# Altium PCB board.PcbDoc
Units mm, origin at the board's own origin, x right, y up, seen from the top; angles counter-clockwise.
Board outline 50 x 30 mm, 2 copper layers (Top Layer, Bottom Layer), stack 0.97 mm thick; 170 components, 47 nets, 375 pads, 78 vias.
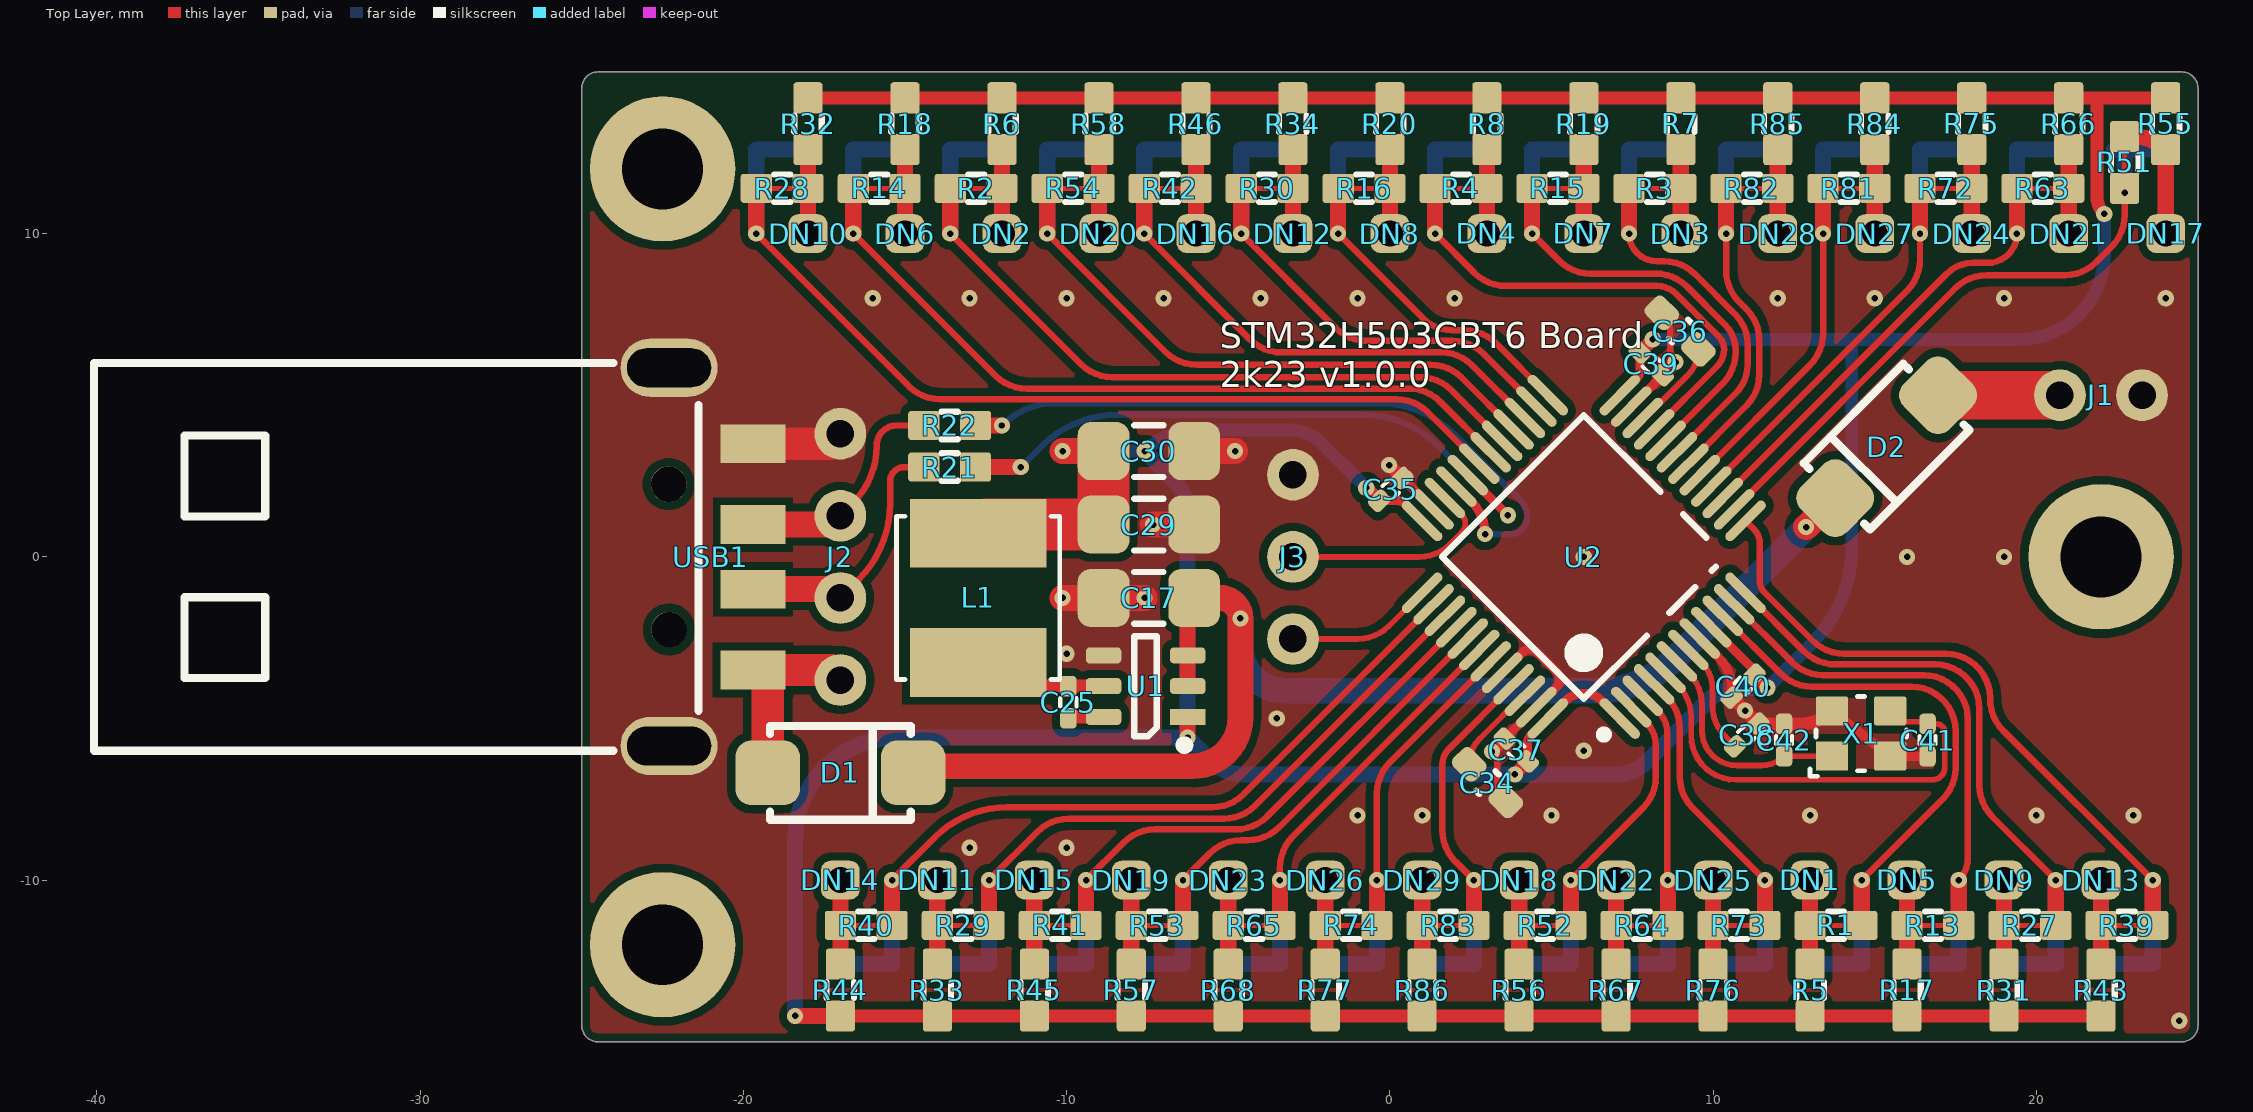
[diagram p0: Top Layer view]
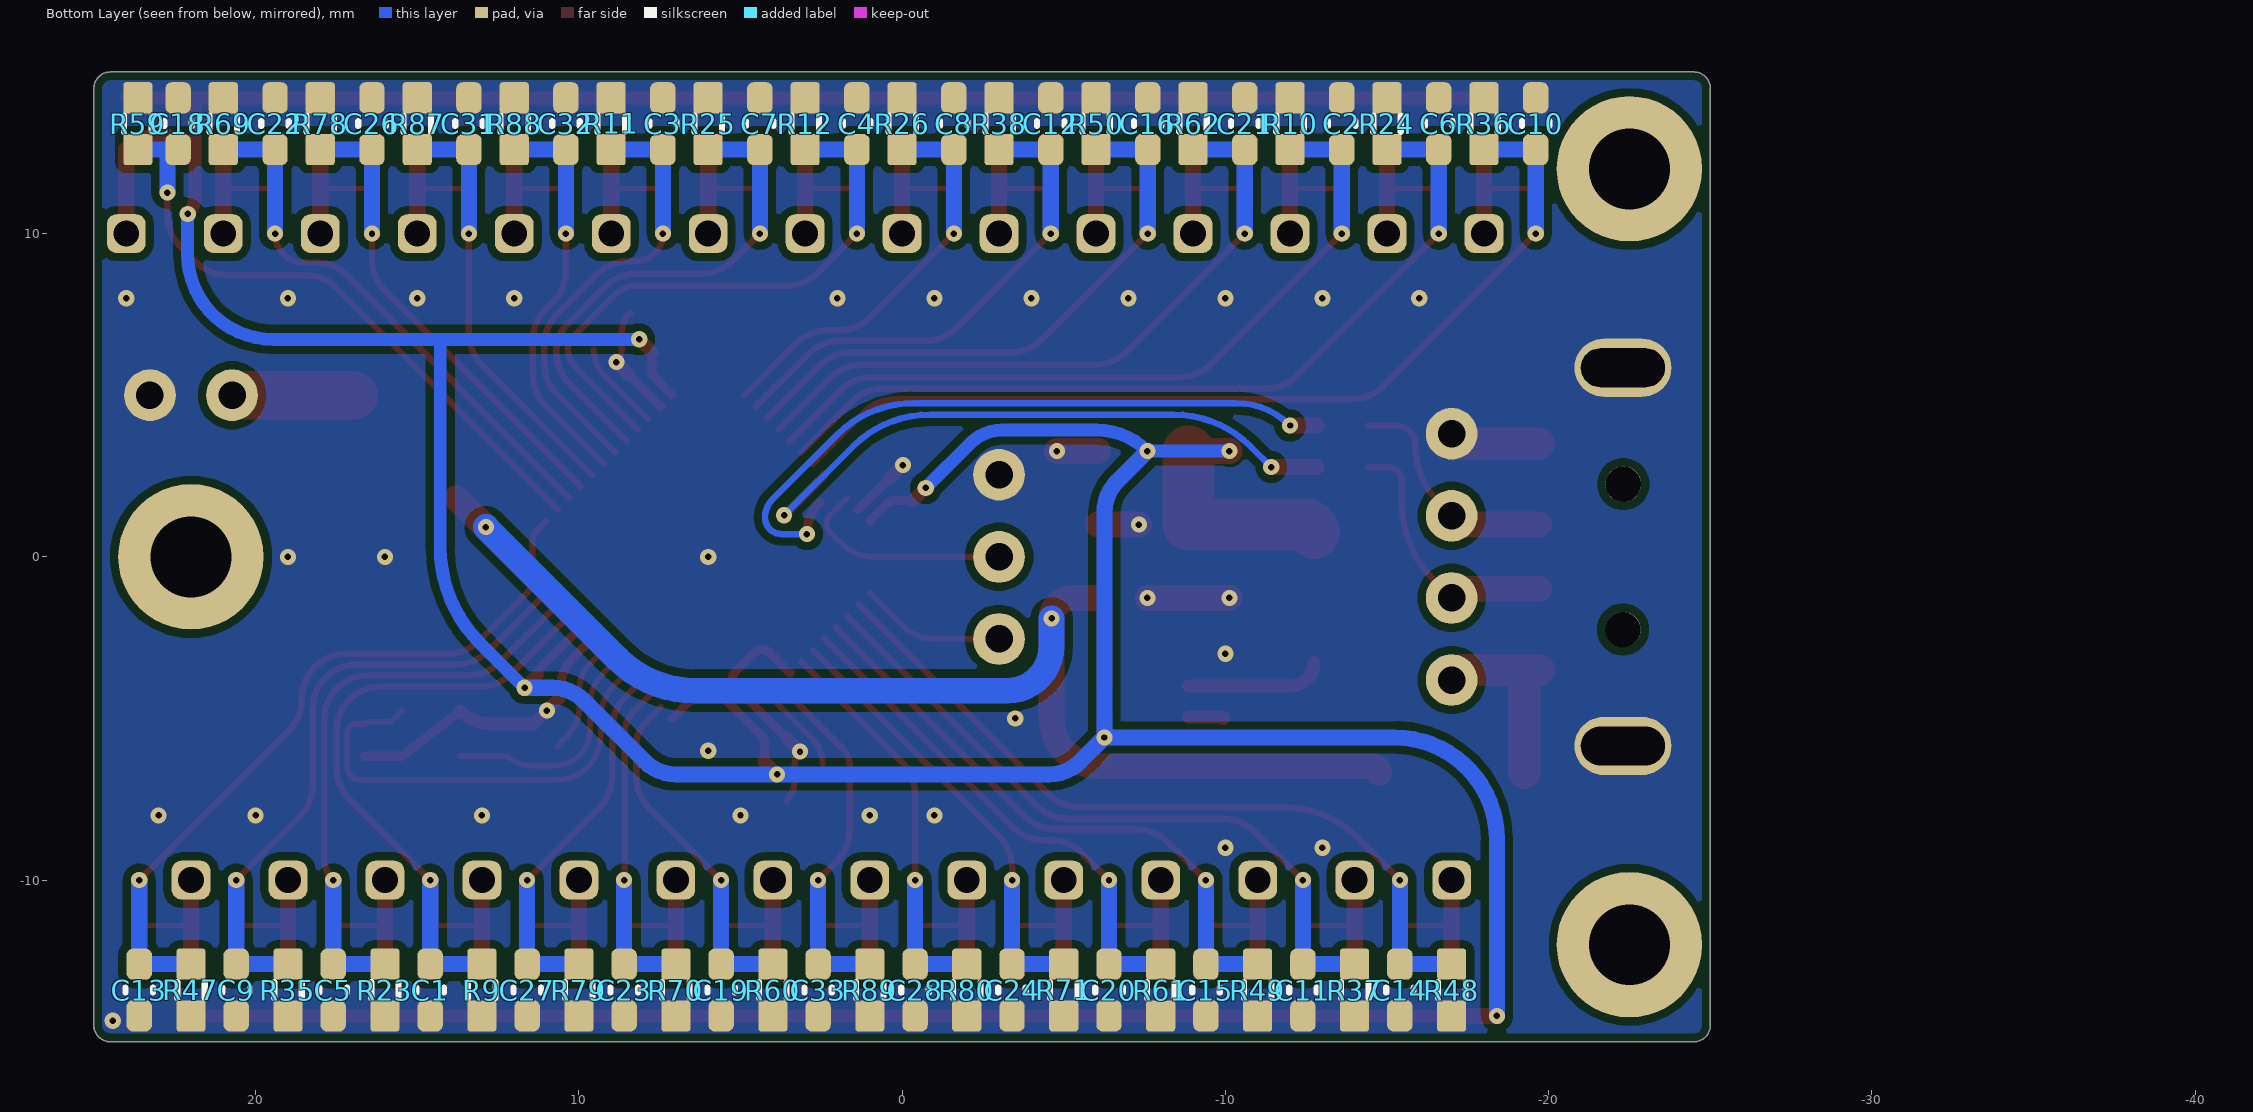
[diagram p1: Bottom Layer view, seen from below]
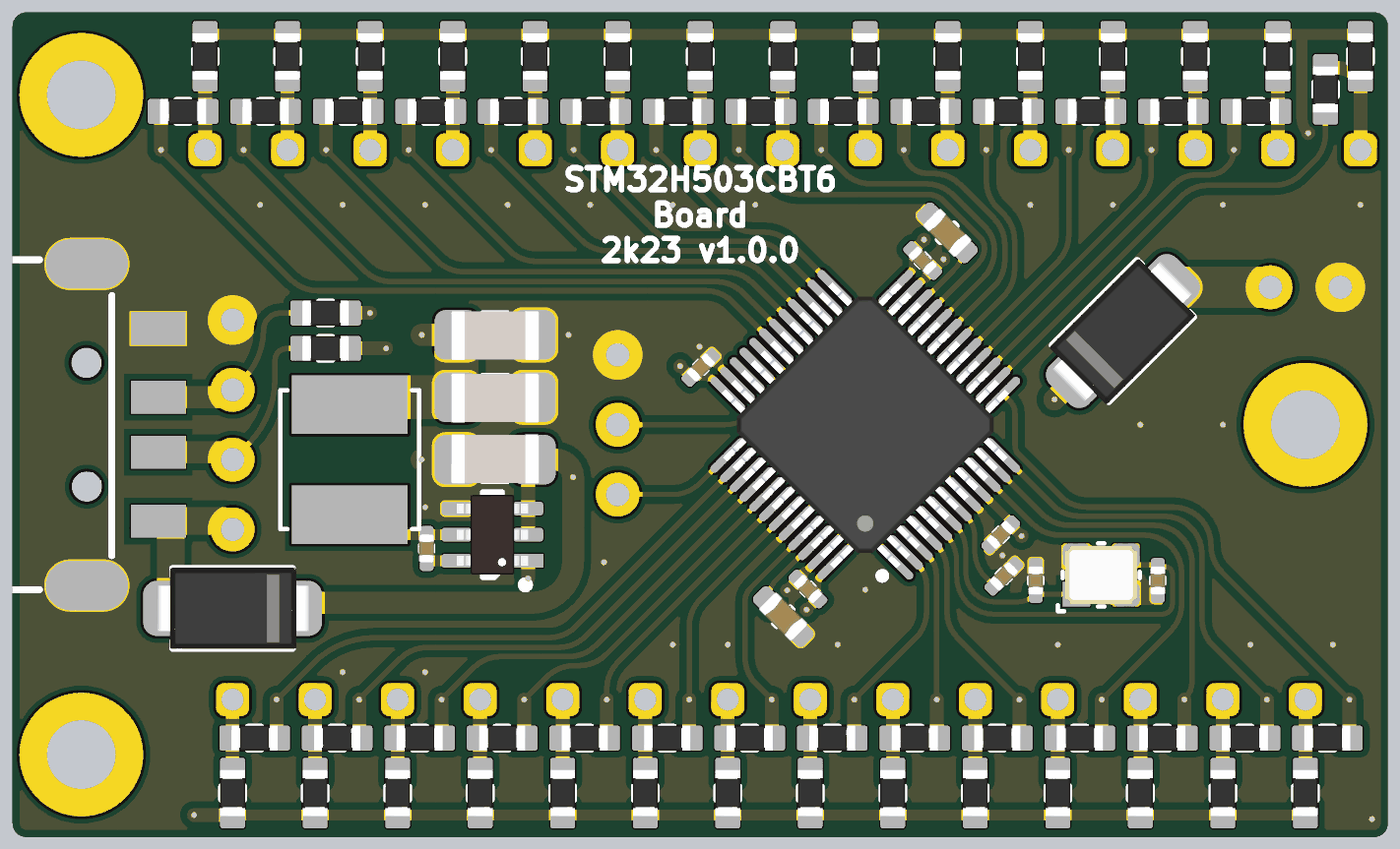
[diagram p2: 3D render of the assembled board from above, using the file's embedded part models]
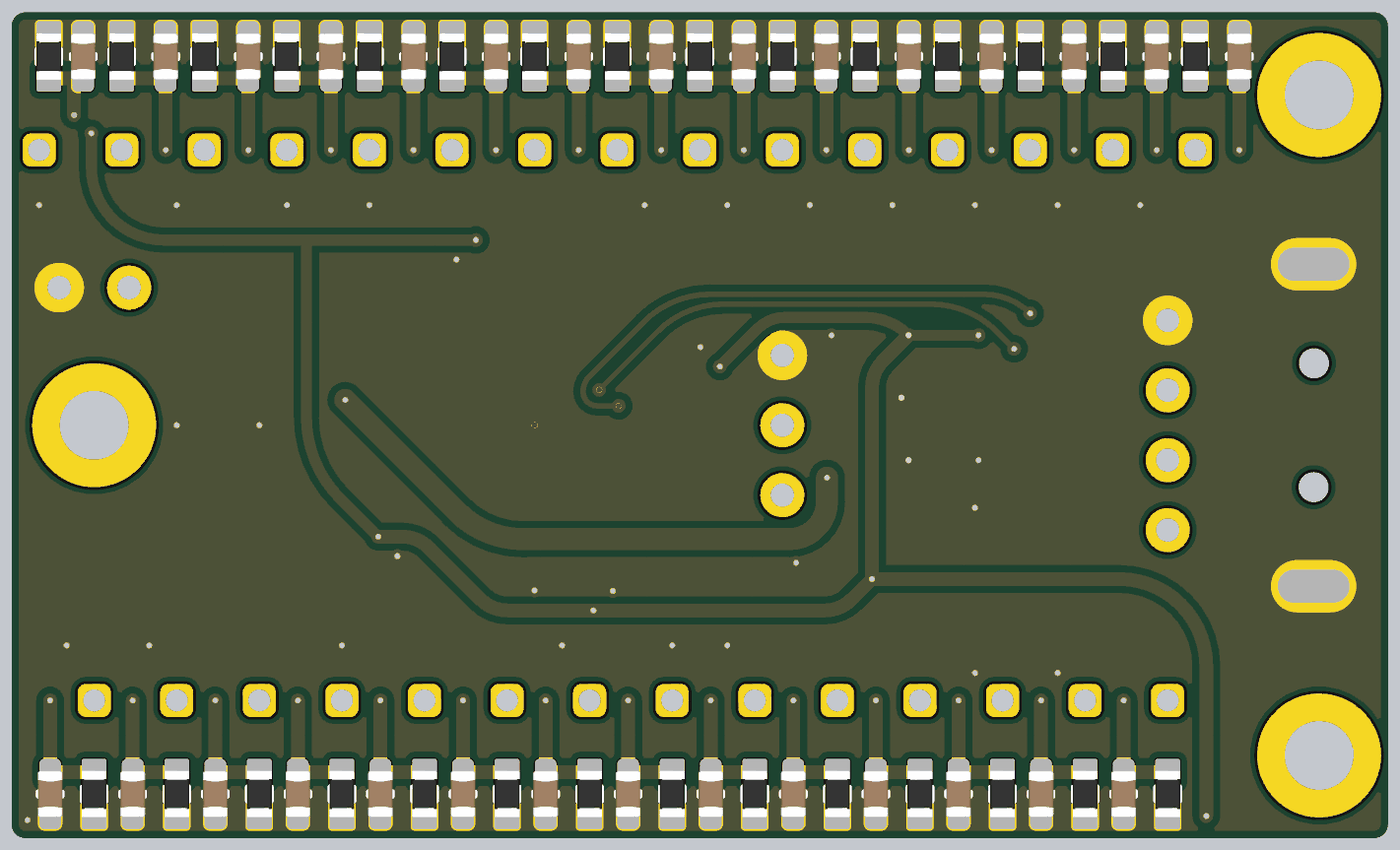
[diagram p3: 3D render of the assembled board from below, using the file's embedded part models]

## Layer stack, top to bottom
Top Solder: solder mask 0.0127, Solder Resist, Dk 3.8
Top Layer: signal copper 0.035
Dielectric: core 0.9, FR-4, Dk 4.5
Bottom Layer: signal copper 0.035
Bottom Solder: solder mask 0.0127, Solder Resist, Dk 3.8

## Board outline
-25,-14.5 ccw(c-24.5,-14.5) -24.5,-15 24.5,-15 ccw(c24.5,-14.5) 25,-14.5 25,14.5 ccw(c24.5,14.5) 24.5,15 -24.5,15 ccw(c-24.5,14.5) -25,14.5

## Design rules (kind name [scope] priority, off if disabled: settings)
AcuteAngle [All] p1: minimum=6.00000000000000E+0001 checktracksonly=FALSE
Clearance Clearance_1 [InNetClass('220')] p1: gap=2 ignorepadtopadclearanceinfootprint=FALSE except(0.13: Arc-Arc Arc-Track Arc-SMDPad Arc-Via Track-Track Track-SMDPad Track-Via SMDPad-SMDPad SMDPad-Via THPad-Via Via-Via; 0.15: Arc-THPad Arc-Text Arc-Hole Track-THPad Track-Text Track-Hole SMDPad-THPad SMDPad-Text SMDPad-Hole THPad-THPad THPad-Text THPad-Hole Via-Text Via-Hole Fill-Text Fill-Hole Poly-Text Poly-Hole Region-Text Region-Hole Text-Text Text-Hole)
Clearance [All] p2: gap=0.25 ignorepadtopadclearanceinfootprint=FALSE except(0.13: Arc-Arc Arc-Track Arc-SMDPad Arc-Via Track-Track Track-SMDPad Track-Via SMDPad-SMDPad SMDPad-Via THPad-Via Via-Via; 0.15: Arc-THPad Arc-Text Arc-Hole Track-THPad Track-Text Track-Hole SMDPad-THPad SMDPad-Text SMDPad-Hole THPad-THPad THPad-Text THPad-Hole Via-Text Via-Hole Fill-Text Fill-Hole Poly-Text Poly-Hole Region-Text Region-Hole Text-Text Text-Hole)
ComponentClearance ComponentClearance_1 [HasFootprint('HDR-1X3') OR HasFootprint('PAD_CAST2_0.8MM')] p1: gap=-1 collisioncheckmode=3 verticalgap=2540 showdistances=FALSE
ComponentClearance ComponentClearance_2 [HasFootprint('TP2030_SMD')] p2: gap=-1 collisioncheckmode=3 verticalgap=2540 showdistances=FALSE
ComponentClearance [All] p3: gap=0.3 collisioncheckmode=3 verticalgap=0.254 showdistances=FALSE
HoleSize [All] p1: absolutevalues=TRUE maxlimit=6 minlimit=0.2 maxpercent=80.000 minpercent=20.000
HoleToHoleClearance HoleToHoleClearance_1 [IsVia vs IsThruPin] p1: gap=0.7 allowstackedmicrovias=TRUE
HoleToHoleClearance [All] p2: gap=0.5 allowstackedmicrovias=TRUE
MinimumSolderMaskSliver [All] p1 off: minsoldermaskwidth=0.254
PlaneClearance [All] p1: clearance=0.45
PlaneConnect [All] p1: planeconnectstyle=Direct reliefexpansion=0.3 reliefentries=4 reliefconductorwidth=0.381 reliefairgap=0.178
PolygonConnect [All] p1: connectstyle=Direct reliefconductorwidth=0.381 reliefentries=4 polygonreliefangle="90 Angle" airgapwidth=0.356
RoutingVias [All] p1: holewidth=0.3 width=0.6 viastyle="Through Hole" minholewidth=0.2 minwidth=0.45 maxholewidth=0.9 maxwidth=1.27
SilkToSilkClearance [All] p1 off: silktosilkclearance=0.254
SilkToSolderMaskClearance [IsPad] p1 off: minsilkscreentomaskgap=0.254 clearancetoexposedcopper=TRUE
SolderMaskExpansion [All] p1: expansion=0.102 istentingtop=FALSE
UnRoutedNet [All] p1: checkbadconnections=TRUE
Width [All] p1: maxlimit=3.81 minlimit=0.14 preferedwidth=0.254
21 further rules are at their usual default settings.

## Components (designator, comment, footprint, x,y, rotation, side; value= is the part's Value field where it differs from the comment)
C1 "100nF" C0603 14.6,-13.4 r90 bottom
C2 "100nF" C0603 -13.6,13.4 r270 bottom
C3 "100nF" C0603 7.4,13.4 r270 bottom
C4 "100nF" C0603 1.4,13.4 r270 bottom
C5 "100nF" C0603 17.6,-13.4 r90 bottom
C6 "100nF" C0603 -16.6,13.4 r270 bottom
C7 "100nF" C0603 4.4,13.4 r270 bottom
C8 "100nF" C0603 -1.6,13.4 r270 bottom
C9 "100nF" C0603 20.6,-13.4 r90 bottom
C10 "100nF" C0603 -19.6,13.4 r270 bottom
C11 "100nF" C0603 -12.4,-13.4 r90 bottom
C12 "100nF" C0603 -4.6,13.4 r270 bottom
C13 "100nF" C0603 23.6,-13.4 r90 bottom
C14 "100nF" C0603 -15.4,-13.4 r90 bottom
C15 "100nF" C0603 -9.4,-13.4 r90 bottom
C16 "100nF" C0603 -7.6,13.4 r270 bottom
C17 "10uF" C1206 -7.456,-1.27 r0 top
C18 "100nF" C0603 22.4,13.4 r270 bottom
C19 "100nF" C0603 5.6,-13.4 r90 bottom
C20 "100nF" C0603 -6.4,-13.4 r90 bottom
C21 "100nF" C0603 -10.6,13.4 r270 bottom
C22 "100nF" C0603 19.4,13.4 r270 bottom
C23 "100nF" C0603 8.6,-13.4 r90 bottom
C24 "100nF" C0603 -3.4,-13.4 r90 bottom
C25 "100nF" C0402 -9.946,-4.5 r270 top
C26 "100nF" C0603 16.4,13.4 r270 bottom
C27 "100nF" C0603 11.6,-13.4 r90 bottom
C28 "100nF" C0603 -0.4,-13.4 r90 bottom
C29 "10uF" C1206 -7.456,1 r180 top
C30 "10uF" C1206 -7.456,3.27 r180 top
C31 "100nF" C0603 13.4,13.4 r270 bottom
C32 "100nF" C0603 10.4,13.4 r270 bottom
C33 "100nF" C0603 2.6,-13.4 r90 bottom
C34 "2.2u" C0603 3.02,-6.984 r135 top
C35 "100nF" C0402 0.025,2.086 r225 top
C36 "2.2u" C0603 8.98,6.984 r315 top
C37 "100nF" C0402 3.914,-5.975 r315 top
C38 "100nF" C0402 11.036,-5.51 r225 top
C39 "100nF" C0402 8.086,5.975 r135 top
C40 "100nF" C0402 10.925,-3.999 r45 top
C41 "18pF" C0402 16.634,-5.666 r90 top
C42 "18pF" C0402 12.196,-5.666 r270 top
D1 "WO" SMA -17,-6.682 r0 top
D2 "WO" SMA 15.367,3.409 r225 top
DN1 "" PAD_CAST2_0.8MM#1 13,-10 r180 top
DN2 "" PAD_CAST2_0.8MM#1 -12,10 r90 top
DN3 "" PAD_CAST2_0.8MM#1 9,10 r90 top
DN4 "" PAD_CAST2_0.8MM#1 3,10 r90 top
DN5 "" PAD_CAST2_0.8MM#1 16,-10 r0 top
DN6 "" PAD_CAST2_0.8MM#1 -15,10 r90 top
DN7 "" PAD_CAST2_0.8MM#1 6,10 r90 top
DN8 "" PAD_CAST2_0.8MM#1 0,10 r90 top
DN9 "" PAD_CAST2_0.8MM#1 19,-10 r0 top
DN10 "" PAD_CAST2_0.8MM#2 -17.2,10 r90 top
DN11 "" PAD_CAST2_0.8MM#1 -14,-10 r90 top
DN12 "" PAD_CAST2_0.8MM#1 -3,10 r90 top
DN13 "" PAD_CAST2_0.8MM#1 22,-10 r90 top
DN14 "" PAD_CAST2_0.8MM#3 -12.6,-10 r90 top
DN15 "" PAD_CAST2_0.8MM#1 -11,-10 r90 top
DN16 "" PAD_CAST2_0.8MM#1 -6,10 r90 top
DN17 "" PAD_CAST2_0.8MM#1 24,10 r90 top
DN18 "" PAD_CAST2_0.8MM#1 4,-10 r0 top
DN19 "" PAD_CAST2_0.8MM#1 -8,-10 r90 top
DN20 "" PAD_CAST2_0.8MM#1 -9,10 r90 top
DN21 "" PAD_CAST2_0.8MM#1 21,10 r270 top
DN22 "" PAD_CAST2_0.8MM#1 7,-10 r0 top
DN23 "" PAD_CAST2_0.8MM#1 -5,-10 r90 top
DN24 "" PAD_CAST2_0.8MM#1 18,10 r90 top
DN25 "" PAD_CAST2_0.8MM#1 10,-10 r0 top
DN26 "" PAD_CAST2_0.8MM#1 -2,-10 r90 top
DN27 "" PAD_CAST2_0.8MM#1 15,10 r90 top
DN28 "" PAD_CAST2_0.8MM#1 12,10 r90 top
DN29 "" PAD_CAST2_0.8MM#1 1,-10 r90 top
J1 "Header 2" HDR-1X2_2.54 22,5 r90 top
J2 "Header 4" HDR-1X4_2.54 -17,0 r180 top
J3 "SWD" HDR-1X3_2.54 -3,0 r180 top
L1 "3.9uH" IND_5020_L5.0-W5.0 -12.74,-1.27 r270 top
R1 "?" R0603 13.8,-11.4 r180 top
R2 "?" R0603 -12.8,11.4 r0 top
R3 "?" R0603 8.2,11.4 r0 top
R4 "?" R0603 2.2,11.4 r0 top
R5 "?" R0603 13,-13.4 r90 top
R6 "?" R0603 -12,13.4 r270 top
R7 "?" R0603 9,13.4 r270 top
R8 "?" R0603 3,13.4 r270 top
R9 "?" R0603 13,-13.4 r90 bottom
R10 "?" R0603 -12,13.4 r270 bottom
R11 "?" R0603 9,13.4 r270 bottom
R12 "?" R0603 3,13.4 r270 bottom
R13 "?" R0603 16.8,-11.4 r180 top
R14 "?" R0603 -15.8,11.4 r0 top
R15 "?" R0603 5.2,11.4 r0 top
R16 "?" R0603 -0.8,11.4 r0 top
R17 "?" R0603 16,-13.4 r90 top
R18 "?" R0603 -15,13.4 r270 top
R19 "?" R0603 6,13.4 r270 top
R20 "?" R0603 0,13.4 r270 top
R21 "22" R0603 -13.619,2.778 r0 top
R22 "22" R0603 -13.619,4.064 r0 top
R23 "?" R0603 16,-13.4 r90 bottom
R24 "?" R0603 -15,13.4 r270 bottom
R25 "?" R0603 6,13.4 r270 bottom
R26 "?" R0603 0,13.4 r270 bottom
R27 "?" R0603 19.8,-11.4 r180 top
R28 "?" R0603 -18.8,11.4 r0 top
R29 "?" R0603 -13.2,-11.4 r180 top
R30 "?" R0603 -3.8,11.4 r0 top
R31 "?" R0603 19,-13.4 r90 top
R32 "?" R0603 -18,13.4 r270 top
R33 "?" R0603 -14,-13.4 r90 top
R34 "?" R0603 -3,13.4 r270 top
R35 "?" R0603 19,-13.4 r90 bottom
R36 "?" R0603 -18,13.4 r270 bottom
R37 "?" R0603 -14,-13.4 r90 bottom
R38 "?" R0603 -3,13.4 r270 bottom
R39 "?" R0603 22.8,-11.4 r180 top
R40 "?" R0603 -16.2,-11.4 r180 top
R41 "?" R0603 -10.2,-11.4 r180 top
R42 "?" R0603 -6.8,11.4 r0 top
R43 "?" R0603 22,-13.4 r90 top
R44 "?" R0603 -17,-13.4 r90 top
R45 "?" R0603 -11,-13.4 r90 top
R46 "?" R0603 -6,13.4 r270 top
R47 "?" R0603 22,-13.4 r90 bottom
R48 "?" R0603 -17,-13.4 r90 bottom
R49 "?" R0603 -11,-13.4 r90 bottom
R50 "?" R0603 -6,13.4 r270 bottom
R51 "?" R0603 22.73,12.2 r90 top
R52 "?" R0603 4.8,-11.4 r180 top
R53 "?" R0603 -7.2,-11.4 r180 top
R54 "?" R0603 -9.8,11.4 r0 top
R55 "?" R0603 24,13.4 r270 top
R56 "?" R0603 4,-13.4 r90 top
R57 "?" R0603 -8,-13.4 r90 top
R58 "?" R0603 -9,13.4 r270 top
R59 "?" R0603 23.644,13.4 r270 bottom
R60 "?" R0603 4,-13.4 r90 bottom
R61 "?" R0603 -8,-13.4 r90 bottom
R62 "?" R0603 -9,13.4 r270 bottom
R63 "?" R0603 20.2,11.4 r0 top
R64 "?" R0603 7.8,-11.4 r180 top
R65 "?" R0603 -4.2,-11.4 r180 top
R66 "?" R0603 21,13.4 r270 top
R67 "?" R0603 7,-13.4 r90 top
R68 "?" R0603 -5,-13.4 r90 top
R69 "?" R0603 21,13.4 r270 bottom
R70 "?" R0603 7,-13.4 r90 bottom
R71 "?" R0603 -5,-13.4 r90 bottom
R72 "?" R0603 17.2,11.4 r0 top
R73 "?" R0603 10.8,-11.4 r180 top
R74 "?" R0603 -1.2,-11.4 r180 top
R75 "?" R0603 18,13.4 r270 top
R76 "?" R0603 10,-13.4 r90 top
R77 "?" R0603 -2,-13.4 r90 top
R78 "?" R0603 18,13.4 r270 bottom
R79 "?" R0603 10,-13.4 r90 bottom
R80 "?" R0603 -2,-13.4 r90 bottom
R81 "?" R0603 14.2,11.4 r0 top
R82 "?" R0603 11.2,11.4 r0 top
R83 "?" R0603 1.8,-11.4 r180 top
R84 "?" R0603 15,13.4 r270 top
R85 "?" R0603 12,13.4 r270 top
R86 "?" R0603 1,-13.4 r90 top
R87 "?" R0603 15,13.4 r270 bottom
R88 "?" R0603 12,13.4 r270 bottom
R89 "?" R0603 1,-13.4 r90 bottom
U1 "AP63203" SOT-23-6 -7.556,-4 r90 top
U2 "STM32H503CBT6" LQFP-48 6,0 r135 top
USB1 "48037-2100" USB-A-TH_480372100 -21,0 r270 top
X1 "12MHZ" CRYSTAL_2.5x2.0mm 14.576,-5.466 r0 top

## Footprints (in the part's own frame and the unit in brackets; to place one, negate y for a bottom-side part, rotate by r counter-clockwise, add the part's x,y. Pads: shape width x height; smd on the part's side, far side on the other; paste and mask are expansions set on the pad)
C0402 [mm] "Chip Capacitor Body"
  rrect50% 0.635x0.508 smd mask+0.05: 1(-0.5,0) 2(0.5,0)
  silkscreen extent -0.13,-0.25 0.13,0.25, body extent -0.52,-0.27 0.53,0.28, height 0.55
C0603 [mil] "Chip Capacitor"
  rrect50% 38x31 smd mask+1.97: 1(-31.5,0) 2(31.5,0)
  silkscreen extent -3,-17 3,17, body extent -33,-18 33,18, height 35
C1206 [mm] "Chip Capacitor"
  rrect50% 1.6x1.8 smd: 1(-1.4,0) 2(1.4,0)
  silkscreen extent -0.45,-0.8 0.45,0.8, body extent -1.6,-0.88 1.6,0.92, height 1.6
CRYSTAL_2.5x2.0mm [mm]
  rect 1x0.9 smd paste+0 mask+0.051: 1(-0.9,-0.7)
  rrect15% 1x0.9 smd paste-2539.97 mask+0.051: 2(0.9,-0.7) 3(0.9,0.7) 4(-0.9,0.7)
  silkscreen extent -1.57,-1.32 1.4,1.15, body extent -1.3,-1.05 1.3,1.05, height 0.55
HDR-1X2_2.54 [mm]
  round 1.6 hole 0.85: 1(0,1.27) 2(0,-1.27)
HDR-1X3_2.54 [mm]
  round 1.6 hole 0.85: 1(0,2.54) 2(0,0) 3(0,-2.54)
HDR-1X4_2.54 [mm]
  round 1.6 hole 0.85: 1(0,3.81) 2(0,1.27) 3(0,-1.27) 4(0,-3.81)
IND_5020_L5.0-W5.0 [mm]
  rect 2.124x4.22 smd: 1(2,0) 2(-2,0)
  silkscreen extent -2.53,-2.53 2.53,2.53, body extent -2.5,-2.5 2.5,2.5, height 2
LQFP-48 [mm]
  oval 1.65x0.3 smd: 1(-4.325,2.75) 2(-4.325,2.25) 3(-4.325,1.75) 4(-4.325,1.25) 5(-4.325,0.75) 6(-4.325,0.25) 7(-4.325,-0.25) 8(-4.325,-0.75) 9(-4.325,-1.25) 10(-4.325,-1.75) 11(-4.325,-2.25) 12(-4.325,-2.75) 25(4.325,-2.75) 26(4.325,-2.25) 27(4.325,-1.75) 28(4.325,-1.25) 29(4.325,-0.75) 30(4.325,-0.25) 31(4.325,0.25) 32(4.325,0.75) 33(4.325,1.25) 34(4.325,1.75) 35(4.325,2.25) 36(4.325,2.75)
  oval 0.3x1.65 smd: 13(-2.75,-4.325) 14(-2.25,-4.325) 15(-1.75,-4.325) 16(-1.25,-4.325) 17(-0.75,-4.325) 18(-0.25,-4.325) 19(0.25,-4.325) 20(0.75,-4.325) 21(1.25,-4.325) 22(1.75,-4.325) 23(2.25,-4.325) 24(2.75,-4.325) 37(2.75,4.325) 38(2.25,4.325) 39(1.75,4.325) 40(1.25,4.325) 41(0.75,4.325) 42(0.25,4.325) 43(-0.25,4.325) 44(-0.75,4.325) 45(-1.25,4.325) 46(-1.75,4.325) 47(-2.25,4.325) 48(-2.75,4.325)
  silkscreen extent -4.45,-3.1 3.1,3.57, body extent -4.5,-4.5 4.5,4.5, height 1.5
PAD_CAST2_0.8MM#1 [mm]
  rrect50% 1.2x1.2 hole 0.8: 1(0,0)
PAD_CAST2_0.8MM#2 [mm]
  rrect50% 1.2x1.2 hole 0.8: 1(0,0.8)
PAD_CAST2_0.8MM#3 [mm]
  rrect50% 1.2x1.2 hole 0.8: 1(0,4.4)
R0603 [mil] "Chip Resistor; Body 1.6 x 0.8 mm (LxW typ)"
  rrect20% 38x35.43 smd mask+1.97: 1(-31.5,0) 2(31.5,0)
  silkscreen extent -10,-17 10,17, body extent -33,-18 33,18, height 22
SMA [mm] "SMA(DO-214AC)"
  rrect50% 2x2 smd: 1(-2.25,0) 2(2.25,0)
  silkscreen extent -2.17,-1.45 2.17,1.45, body extent -2.78,-1.48 2.83,1.48, height 2.9
SOT-23-6 [mm]
  rect 0.5x1.1 smd mask+0.05: 1(-0.95,-1.3)
  rrect50% 0.5x1.1 smd mask+0.05: 2(0,-1.3) 3(0.95,-1.3) 4(0.95,1.3) 5(0,1.3) 6(-0.95,1.3)
  silkscreen extent -1.95,-1.33 1.55,0.35, body extent -1.45,-1.3 1.45,1.3, height 1.14
USB-A-TH_480372100 [mm]
  rect 1.2x2 smd paste-100 mask+0.051: 1(3.5,1.3) 2(1,1.3) 3(-1,1.3) 4(-3.5,1.3)
  oval 1.8x3 hole 1.2 slot 2.6 at 90 deg paste-2539.97 mask+0.051: 5(-5.85,-1.3) 6(5.85,-1.3)
  round 1.1 hole 1.1 unplated paste-2539.97: ""(-2.25,-1.313) ""(2.25,-1.3)
  silkscreen extent -6,-19.09 6,-0.39, body extent -6,-19.09 6,-0.4, height 3.1

## Part data
C1 C2 C3 C4 C5 C6 C7 C8 C9 C10 C11 C12 C13 C14 C15 C16 C18 C19 C20 C21 C22 C23 C24 C26 C27 C28 C31 C32 C33: library part CAP, "100nF 0603"
C17 C29 C30: library part CAP, "10uf 50V 1206", LCSC part number=C89632, P/N=CL31B106KBHNNNE
C25: library part CAP, "100nF 0402", LCSC part number=C131394, P/N=CC0402KRX7R9BB104
C34 C36: library part Cap
C35 C37 C38 C39 C40: library part CAP
C41 C42: library part CAP, "18pF 50V 0402", LCSC part number=C33149, P/N=GRM1555C1H180JA01D
D1 D2: library part US1M-13-F
DN1 DN2 DN3 DN4 DN5 DN6 DN7 DN8 DN9 DN10 DN11 DN12 DN13 DN14 DN15 DN16 DN17 DN18 DN19 DN20 DN21 DN22 DN23 DN24 DN25 DN26 DN27 DN28 DN29: library part "dummy net"
J3: library part "Header 3"
L1: library part SRN3015-100M, "3.9uH 2A", LCSC part number=C115009, P/N=SWPA5020S3R9NT
R1 R2 R3 R4 R5 R6 R7 R8 R9 R10 R11 R12 R13 R14 R15 R16 R17 R18 R19 R20 R21 R22 R23 R24 R25 R26 R27 R28 R29 R30 R31 R32 R33 R34 R35 R36 R37 R38 R39 R40 R41 R42 R43 R44 R45 R46 R47 R48 R49 R50 R51 R52 R53 R54 R55 R56 R57 R58 R59 R60 R61 R62 R63 R64 R65 R66 R67 R68 R69 R70 R71 R72 R73 R74 R75 R76 R77 R78 R79 R80 R81 R82 R83 R84 R85 R86 R87 R88 R89: library part RES
U1: LCSC part number=C780769, P/N=AP63203WU-7
USB1: LCSC part number=C136453, P/N=48037-2100
X1: library part "CRYSTAL 12MHZ 3.20mm x 2.50mm", "CRYSTAL 12MHZ 10PF SMD", LCSC part number=C284155, P/N=TXM12M0004252FBCEO00T

## Free pads (board coordinates)
  round 4.5 hole 2.5: M(-22.5,-12) M(-22.5,12) M(22,0)

## Via types
v1: diameter 0.5, hole 0.2, Top Layer to Bottom Layer, tented both sides, 78 vias

## Nets (pads, with @x,y where several pads share a name; then routed paths per layer and width w, separated by ;. In a path a pad name is that pad's centre, name@x,y a point inside that pad or via, vN(x,y) a via of type N, cw(c..) or ccw(c..) an arc to the next point about the centre after c; other vN are vias at no path point)
3V3: C29.2 C30.2 C35.2 C37.2 C39.2 C40.2 L1.2 R5.1 R6.1 R7.1 R8.1 R17.1 R18.1 R19.1 R20.1 R31.1 R32.1 R33.1 R34.1 R43.1 R44.1 R45.1 R46.1 R55.1 R56.1 R57.1 R58.1 R66.1 R67.1 R68.1 R75.1 R76.1 R77.1 R84.1 R85.1 R86.1 U1.1 U2.1 U2.9 U2.24 U2.36 U2.48 | length 192.8
  Top Layer w0.28: C35.2 -0.321,1.739 0.237,1.739 cw(c0.237,1.414) 0.467,1.644 U2.36 ; C37.2 4.26,-6.321 4.26,-5.763 cw(c4.586,-5.763) 4.356,-5.533 U2.48 5.433,-4.456 cw(c6,-5.022) 6.566,-4.456 U2.1 ; U2.24 7.644,5.533 ccw(c7.414,5.763) 7.739,5.763 7.739,6.321 C39.2 ; U2.9 11.184,-3.416 cw(c10.955,-3.646) C40.2
  Top Layer w0.4: R32.1 R18.1 R6.1 R58.1 R46.1 R34.1 R20.1 R8.1 R19.1 R7.1 R85.1 R84.1 R75.1 R66.1 21.869,14.2 ; R44.1 R33.1 R45.1 R57.1 R68.1 R77.1 R86.1 R56.1 R67.1 R76.1 R5.1 R17.1 R31.1 R43.1 ; v1(-0.73,2.134) C35.2 ; v1(3.866,-6.73) C37.2 ; C39.2 v1(8.134,6.73) ; C40.2 v1(11.681,-4.047) ; v1(22.102,10.609) cw(c22.664,11.171) 21.869,11.171 21.869,14.2 ; R55.1 21.869,14.2
  Top Layer w0.5: v1(-18.4,-14.2) R44.1 ; v1(-6.256,-5.588) U1.1
  Top Layer w0.8: v1(-10.126,3.27) C30.2
  Top Layer w1.6: L1.2 cw(c-12.47,0.73) -12.47,1 C29.2 C30.2
  Bottom Layer w0.4: v1(-10.126,3.27) v1(-7.586,3.27) cw(c-6.017,1.701) -6.017,3.92 -3.084,3.92 cw(c-3.084,2.548) -2.115,3.518 v1(-0.73,2.134) ; v1(8.134,6.73) 14.288,6.73 ; v1(11.681,-4.047) 13.065,-2.663 ccw(c10.112,0.29) 14.288,0.29 14.288,6.73 ; v1(22.102,10.609) 22.102,9.365 cw(c19.468,9.365) 19.468,6.73 14.288,6.73
  Bottom Layer w0.5: v1(-18.4,-14.2) -18.4,-8.752 cw(c-15.236,-8.752) -15.236,-5.588 v1(-6.256,-5.588) ; v1(-7.586,3.27) -6.658,2.342 cw(c-7.628,1.372) -6.256,1.372 v1(-6.256,-5.588) ; v1(11.681,-4.047) 10.811,-4.047 ccw(c10.811,-5.419) 9.841,-4.449 7.962,-6.328 cw(c6.992,-5.359) 6.992,-6.73 v1(3.866,-6.73) -4.546,-6.73 cw(c-4.546,-5.359) -5.516,-6.328 v1(-6.256,-5.588)
5V: D1.1 J2.1 USB1.1 | length 6.1
  Top Layer w1: USB1.1 -17.31,-3.5 cw(c-17.31,-3.81) J2.1 ; D1.1 USB1.1@-19.25,-3.505
DM: R21.2 U2.32 | length 19.9
  Top Layer w0.28: U2.32 v1(3.653,1.286)
  Top Layer w0.5: R21.2 v1(-11.419,2.778)
  Bottom Layer w0.2: v1(-11.419,2.778) -10.788,3.408 cw(c-8.39,1.009) -8.39,4.402 -0.868,4.402 cw(c-0.868,1.009) 1.531,3.408 v1(3.653,1.286)
DP: R22.2 U2.33 | length 21.4
  Top Layer w0.28: U2.33@2.543,1.689 cw(c1.572,0.72) 2.944,0.72 v1(2.944,0.702)
  Top Layer w0.5: R22.2 v1(-12.003,4.064)
  Bottom Layer w0.2: v1(-12.003,4.064) cw(c-10.329,2.39) -10.329,4.757 -0.371,4.757 cw(c-0.372,1.365) 2.027,3.764 4.008,1.783 cw(c3.445,1.219) 4.242,1.219 cw(c3.725,1.219) 3.725,0.702 v1(2.944,0.702)
GND: C1.1 C2.1 C3.1 C4.1 C5.1 C6.1 C7.1 C8.1 C9.1 C10.1 C11.1 C12.1 C13.1 C14.1 C15.1 C16.1 C17.1 C18.1 C19.1 C20.1 C21.1 C22.1 C23.1 C24.1 C26.1 C27.1 C28.1 C29.1 C30.1 C31.1 C32.1 C33.1 C34.1 C35.1 C36.1 C37.1 C38.1 C39.1 C40.1 C41.1 C42.1 J1.2 J2.4 J3.3 R9.1 R10.1 R11.1 R12.1 R23.1 R24.1 R25.1 R26.1 R35.1 R36.1 R37.1 R38.1 R47.1 R48.1 R49.1 R50.1 R59.1 R60.1 R61.1 R62.1 R69.1 R70.1 R71.1 R78.1 R79.1 R80.1 R87.1 R88.1 R89.1 U1.4 U2.8 U2.23 U2.35 U2.44 U2.47 USB1.4 USB1.5 USB1.6 X1.2 X1.4 | length 29.9
  Top Layer w0.2: v1(3.159,-6.023) cw(c2.769,-6.413) 3.32,-6.413 3.32,-6.909 ccw(c4.226,-6.909) C34.1 ; C36.1 cw(c7.774,6.909) 8.679,6.909 8.679,6.413 ccw(c9.231,6.413) v1(8.841,6.023)
  Top Layer w0.28: C35.1 U2.35 ; U2.44 4.11,-2.951 cw(c4.332,-3.173) 4.554,-2.951 5.165,-3.561 cw(c4.937,-3.789) 5.165,-4.017 U2.47 C37.1 ; U2.23 C39.1 ; U2.8 10.17,-3.11 cw(c9.2,-4.079) 10.572,-4.079 C40.1
  Top Layer w0.3: X1.4 X1.2 C41.1
  Top Layer w0.4: v1(-0.023,2.841) C35.1 ; v1(3.159,-6.023) C37.1 ; C39.1 v1(8.841,6.023) ; C40.1@10.586,-4.353 v1(10.988,-4.754) C38.1 ; C38.1@11.4,-5.166 12.711,-5.166 ccw(c12.711,-3.8) X1.4
  Top Layer w0.8: v1(-10.126,-1.27) C17.1 v1(-7.586,-1.27) ; v1(-7.326,1) C29.1 ; C30.1 v1(-4.786,3.27)
  Top Layer w1: USB1.4 -17.31,3.5 ccw(c-17.31,3.81) J2.4
  other v1: 24.42,-14.352 -13,-9 -10,-9 -1,-8 1,-8 5,-8 13,-8 20,-8 23,-8 6,-6 -3.5,-5 -10,-3 6,0 16,0 19,0 -16,8 -13,8 -10,8 -7,8 -4,8 -1,8 2,8 12,8 15,8 19,8 24,8
IO0: C1.2 DN1.1 R1.1 R1.2 R5.2 R9.2 U2.10 | length 24.4
  Top Layer w0.15: R1.2 R1.1
  Top Layer w0.2: U2.10 12.086,-3.611 ; 12.087,-3.612 ccw(c13.056,-2.642) 13.056,-4.013 16.129,-4.013 cw(c16.129,-5.385) 17.501,-5.385 17.501,-6.531 cw(c16.129,-6.531) 17.099,-7.501 v1(14.6,-10)
  Top Layer w0.5: R5.2 DN1.1 ; R1.1 v1(14.6,-10)
  Bottom Layer w0.5: R9.2 C1.2 v1(14.6,-10)
IO1: C5.2 DN5.1 R13.1 R13.2 R17.2 R23.2 U2.11 | length 23.7
  Top Layer w0.15: R13.2 R13.1
  Top Layer w0.2: U2.11 12.438,-3.256 ccw(c13.408,-2.286) 13.408,-3.658 16.51,-3.658 cw(c16.51,-5.029) 17.882,-5.029 17.882,-9.32 cw(c16.921,-9.32) v1(17.6,-10)
  Top Layer w0.5: R17.2 DN5.1 ; R13.1 v1(17.6,-10)
  Bottom Layer w0.5: R23.2 C5.2 v1(17.6,-10)
IO2: C9.2 DN9.1 R27.1 R27.2 R31.2 R35.2 U2.12 | length 24.9
  Top Layer w0.15: R27.2 R27.1
  Top Layer w0.2: U2.12 12.815,-2.926 ccw(c13.784,-1.956) 13.784,-3.327 16.866,-3.327 cw(c16.866,-4.699) 18.237,-4.699 18.237,-7.069 ccw(c19.609,-7.069) 18.639,-8.039 v1(20.6,-10)
  Top Layer w0.5: R31.2 DN9.1 ; R27.1 v1(20.6,-10)
  Bottom Layer w0.5: R35.2 C9.2 v1(20.6,-10)
IO3: C13.2 DN13.1 R39.1 R39.2 R43.2 R47.2 U2.13 | length 28.4
  Top Layer w0.15: R39.2 R39.1
  Top Layer w0.2: U2.13 11.268,0.848 cw(c10.842,0.423) 11.444,0.423 11.444,-0.759 ccw(c11.916,-0.759) 11.582,-1.092 13.086,-2.595 ccw(c14.056,-1.626) 14.056,-2.997 17.196,-2.997 cw(c17.196,-4.369) 18.567,-4.369 18.567,-4.399 ccw(c19.939,-4.399) 18.969,-5.369 v1(23.6,-10)
  Top Layer w0.5: R43.2 R39.2 DN13.1 ; R39.1 v1(23.6,-10)
  Bottom Layer w0.5: R47.2 C13.2 v1(23.6,-10)
IO4: C18.2 DN17.1 R51.1 R51.2 R55.2 R59.2 U2.14 | length 24.9
  Top Layer w0.15: R51.1 R51.2
  Top Layer w0.2: U2.14 17.492,8.31 cw(c18.462,7.341) 18.462,8.712 20.874,8.712 ccw(c20.874,10.084) 21.844,9.114 22.328,9.598 ; 22.329,9.599 ccw(c21.358,10.568) 22.73,10.568 v1(22.73,11.27)
  Top Layer w0.5: v1(22.73,11.27) R51.1 ; R51.2 23.034,13 cw(c23.034,11.634) R55.2 DN17.1
  Bottom Layer w0.5: C18.2 R59.2 ; v1(22.73,11.27) C18.2@22.73,12.552
IO5: C22.2 DN21.1 R63.1 R63.2 R66.2 R69.2 U2.15 | length 22.4
  Top Layer w0.15: R63.1 R63.2
  Top Layer w0.2: U2.15 17.238,8.764 cw(c18.034,7.968) 18.034,9.093 18.493,9.093 ccw(c18.493,10) v1(19.4,10)
  Top Layer w0.5: v1(19.4,10) R63.1 ; DN21.1 R63.2 R66.2
  Bottom Layer w0.5: v1(19.4,10) C22.2 R69.2
IO6: C26.2 DN24.1 R72.1 R72.2 R75.2 R78.2 U2.16 | length 20.2
  Top Layer w0.15: R72.1 R72.2
  Top Layer w0.2: U2.16 15.998,8.231 ccw(c15.028,9.2) 16.4,9.2 v1(16.4,10)
  Top Layer w0.5: v1(16.4,10) R72.1 ; DN24.1 R75.2
  Bottom Layer w0.5: v1(16.4,10) C26.2 R78.2
IO7: C31.2 DN27.1 R81.1 R81.2 R84.2 R87.2 U2.17 | length 18.8
  Top Layer w0.15: R81.1 R81.2
  Top Layer w0.2: U2.17 12.998,5.938 ccw(c12.028,6.908) 13.4,6.908 v1(13.4,10)
  Top Layer w0.5: v1(13.4,10) R81.1 ; DN27.1 R81.2 R84.2
  Bottom Layer w0.5: v1(13.4,10) C31.2 R87.2
IO8: C2.2 DN2.1 R2.1 R2.2 R6.2 R10.2 U2.29 | length 29.4
  Top Layer w0.15: R2.1 R2.2
  Top Layer w0.2: v1(-13.6,10) -9.564,5.964 ccw(c-8.595,6.934) -8.595,5.563 0.93,5.563 cw(c0.93,4.191) 1.9,5.161 U2.29
  Top Layer w0.5: v1(-13.6,10) R2.1 ; DN2.1 R2.2 R6.2
  Bottom Layer w0.5: v1(-13.6,10) C2.2 R10.2
IO9: C6.2 DN6.1 R14.1 R14.2 R18.2 R24.2 U2.30 | length 32.2
  Top Layer w0.15: R14.1 R14.2
  Top Layer w0.2: v1(-16.6,10) -12.209,5.609 ccw(c-11.239,6.579) -11.239,5.207 0.578,5.207 cw(c0.578,3.835) 1.548,4.805 U2.30
  Top Layer w0.5: v1(-16.6,10) R14.1 ; DN6.1 R14.2 R18.2
  Bottom Layer w0.5: v1(-16.6,10) C6.2 R24.2
IO10: C10.2 DN10.1 R28.1 R28.2 R32.2 R36.2 U2.31 | length 35
  Top Layer w0.15: R28.1 R28.2
  Top Layer w0.2: v1(-19.6,10) -14.879,5.279 ; -14.878,5.278 ccw(c-13.909,6.248) -13.909,4.877 0.201,4.877 cw(c0.201,3.505) 1.171,4.475 U2.31
  Top Layer w0.5: v1(-19.6,10) R28.1 ; DN10.1 R32.2
  Bottom Layer w0.5: v1(-19.6,10) C10.2 R36.2
IO11: C14.2 DN14.1 R40.1 R40.2 R44.2 R48.2 U2.38 | length 29.9
  Top Layer w0.15: R40.2 R40.1
  Top Layer w0.2: v1(-15.4,-10) -14.074,-8.674 cw(c-11.835,-10.914) -11.835,-7.747 -5.497,-7.747 ccw(c-5.497,-6.375) -4.527,-7.345 U2.38
  Top Layer w0.5: R44.2 R40.2 DN14.1 ; R40.1 v1(-15.4,-10)
  Bottom Layer w0.5: R48.2 C14.2 v1(-15.4,-10)
IO12: C19.2 DN18.1 R52.1 R52.2 R56.2 R60.2 U2.2 | length 16.5
  Top Layer w0.15: R52.2 R52.1
  Top Layer w0.2: v1(5.6,-10) 7.828,-7.772 ccw(c6.858,-6.802) 8.23,-6.802 8.23,-5.842 ccw(c7.191,-5.842) 7.925,-5.108 U2.2
  Top Layer w0.5: R56.2 R52.2 DN18.1 ; R52.1 v1(5.6,-10)
  Bottom Layer w0.5: R60.2 C19.2 v1(5.6,-10)
IO13: C23.2 DN22.1 R64.1 R64.2 R67.2 R70.2 U2.3 | length 15.8
  Top Layer w0.15: R64.2 R64.1
  Top Layer w0.2: U2.3 8.302,-4.777 cw(c7.618,-5.461) 8.585,-5.461 8.585,-9.964 ccw(c8.636,-9.964) v1(8.6,-10)
  Top Layer w0.5: R67.2 DN22.1 ; R64.1 v1(8.6,-10)
  Bottom Layer w0.5: R70.2 C23.2 v1(8.6,-10)
IO14: C27.2 DN25.1 R73.1 R73.2 R76.2 R79.2 U2.4 | length 17.2
  Top Layer w0.15: R73.2 R73.1
  Top Layer w0.2: U2.4 8.564,-4.332 cw(c7.595,-5.302) 8.966,-5.302 8.966,-6.798 ccw(c10.338,-6.798) 9.368,-7.768 v1(11.6,-10)
  Top Layer w0.5: R76.2 DN25.1 ; R73.1 v1(11.6,-10)
  Bottom Layer w0.5: R79.2 C27.2 v1(11.6,-10)
IO15: C32.2 DN28.1 R82.1 R82.2 R85.2 R88.2 U2.18 | length 18.1
  Top Layer w0.15: R82.1 R82.2
  Top Layer w0.2: U2.18 11.028,4.675 ccw(c10.058,5.645) 11.43,5.645 11.43,6.696 ccw(c10.058,6.696) 11.028,7.666 10.802,7.893 cw(c11.771,8.863) 10.4,8.863 v1(10.4,10)
  Top Layer w0.5: v1(10.4,10) R82.1 ; DN28.1 R85.2
  Bottom Layer w0.5: v1(10.4,10) C32.2 R88.2
IO16: C3.2 DN3.1 R3.1 R3.2 R7.2 R11.2 U2.19 | length 19.4
  Top Layer w0.15: R3.1 R3.2
  Top Layer w0.2: v1(7.4,10) ccw(c8.256,10) 8.256,9.144 8.474,9.144 cw(c8.474,7.772) 9.444,8.742 10.673,7.514 cw(c9.703,6.544) 11.074,6.544 11.074,5.996 cw(c9.703,5.996) 10.673,5.026 U2.19
  Top Layer w0.5: v1(7.4,10) R3.1 ; DN3.1 R7.2
  Bottom Layer w0.5: v1(7.4,10) C3.2 R11.2
IO17: C7.2 DN7.1 R15.1 R15.2 R19.2 R25.2 U2.20 | length 21.3
  Top Layer w0.15: R15.1 R15.2
  Top Layer w0.2: v1(4.4,10) 5.235,9.165 ccw(c6.205,10.135) 6.205,8.763 8.22,8.763 cw(c8.22,7.391) 9.19,8.361 10.37,7.181 cw(c9.59,6.401) 10.693,6.401 10.693,6.322 cw(c9.322,6.322) 10.292,5.352 U2.20
  Top Layer w0.5: v1(4.4,10) R15.1 ; DN7.1 R19.2
  Bottom Layer w0.5: v1(4.4,10) C7.2 R25.2
IO18: C11.2 DN11.1 R29.1 R29.2 R33.2 R37.2 U2.39 | length 27.2
  Top Layer w0.15: R29.2 R29.1
  Top Layer w0.2: v1(-12.4,-10) -10.904,-8.504 cw(c-9.934,-9.474) -9.934,-8.103 -5.146,-8.103 ccw(c-5.146,-6.731) -4.176,-7.701 U2.39
  Top Layer w0.5: R33.2 R29.2 DN11.1 ; R29.1 v1(-12.4,-10)
  Bottom Layer w0.5: R37.2 C11.2 v1(-12.4,-10)
IO19: C15.2 DN15.1 R41.1 R41.2 R45.2 R49.2 U2.40 | length 24.4
  Top Layer w0.15: R41.2 R41.1
  Top Layer w0.2: v1(-9.4,-10) -8.234,-8.835 cw(c-7.264,-9.804) -7.264,-8.433 -4.769,-8.433 ccw(c-4.769,-7.061) -3.799,-8.031 U2.40
  Top Layer w0.5: R45.2 R41.2 DN15.1 ; R41.1 v1(-9.4,-10)
  Bottom Layer w0.5: R49.2 C15.2 v1(-9.4,-10)
IO20: C20.2 DN19.1 R53.1 R53.2 R57.2 R61.2 U2.41 | length 21.6
  Top Layer w0.15: R53.2 R53.1
  Top Layer w0.2: v1(-6.4,-10) -5.565,-9.165 cw(c-4.595,-10.135) -4.595,-8.763 -4.392,-8.763 ccw(c-4.392,-7.391) -3.422,-8.361 U2.41
  Top Layer w0.5: R57.2 R53.2 DN19.1 ; R53.1 v1(-6.4,-10)
  Bottom Layer w0.5: R61.2 C20.2 v1(-6.4,-10)
IO21: C24.2 DN23.1 R65.1 R65.2 R68.2 R71.2 U2.42 | length 19.4
  Top Layer w0.15: R65.2 R65.1
  Top Layer w0.2: v1(-3.4,-10) -3.4,-9.614 cw(c-2.028,-9.614) -2.998,-8.644 U2.42
  Top Layer w0.5: R68.2 R65.2 DN23.1 ; R65.1 v1(-3.4,-10)
  Bottom Layer w0.5: R71.2 C24.2 v1(-3.4,-10)
IO22: C28.2 DN26.1 R74.1 R74.2 R77.2 R80.2 U2.43 | length 18
  Top Layer w0.15: R74.2 R74.1
  Top Layer w0.2: v1(-0.4,-10) -0.4,-7.321 cw(c0.972,-7.321) 0.002,-6.351 U2.43
  Top Layer w0.5: R77.2 R74.2 DN26.1 ; R74.1 v1(-0.4,-10)
  Bottom Layer w0.5: R80.2 C28.2 v1(-0.4,-10)
IO23: C33.2 DN29.1 R83.1 R83.2 R86.2 R89.2 U2.45 | length 17.1
  Top Layer w0.15: R83.2 R83.1
  Top Layer w0.2: v1(2.6,-10) 2.027,-9.427 cw(c2.997,-8.457) 1.626,-8.457 1.626,-6.426 cw(c2.312,-6.426) 1.827,-5.941 U2.45
  Top Layer w0.5: R86.2 R83.2 DN29.1 ; R83.1 v1(2.6,-10)
  Bottom Layer w0.5: R89.2 C33.2 v1(2.6,-10)
IO24: C4.2 DN4.1 R4.1 R4.2 R8.2 R12.2 U2.21 | length 23.6
  Top Layer w0.15: R4.1 R4.2
  Top Layer w0.2: v1(1.4,10) 2.616,8.784 ccw(c3.586,9.754) 3.586,8.382 8.255,8.382 cw(c8.255,7.524) 8.862,8.131 10.176,6.816 cw(c9.786,6.426) 10.338,6.426 cw(c9.564,6.426) 10.111,5.879 U2.21
  Top Layer w0.5: v1(1.4,10) R4.1 ; DN4.1 R4.2 R8.2
  Bottom Layer w0.5: v1(1.4,10) C4.2 R12.2
IO25: C8.2 DN8.1 R16.1 R16.2 R20.2 R26.2 U2.25 | length 18.2
  Top Layer w0.15: R16.1 R16.2
  Top Layer w0.2: v1(-1.6,10) 1.007,7.393 ccw(c1.93,8.316) 1.93,7.01 2.31,7.01 cw(c2.31,5.639) 3.28,6.609 U2.25
  Top Layer w0.5: v1(-1.6,10) R16.1 ; DN8.1 R16.2 R20.2
  Bottom Layer w0.5: v1(-1.6,10) C8.2 R26.2
IO26: C12.2 DN12.1 R30.1 R30.2 R34.2 R38.2 U2.26 | length 21
  Top Layer w0.15: R30.1 R30.2
  Top Layer w0.2: v1(-4.6,10) -1.682,7.082 ccw(c-0.712,8.052) -0.712,6.68 1.933,6.68 cw(c1.933,5.309) 2.903,6.278 U2.26
  Top Layer w0.5: v1(-4.6,10) R30.1 ; DN12.1 R30.2 R34.2
  Bottom Layer w0.5: v1(-4.6,10) C12.2 R38.2
IO27: C16.2 DN16.1 R42.1 R42.2 R46.2 R50.2 U2.27 | length 23.8
  Top Layer w0.15: R42.1 R42.2
  Top Layer w0.2: v1(-7.6,10) -4.326,6.726 ccw(c-3.357,7.696) -3.357,6.325 1.582,6.325 cw(c1.582,4.953) 2.552,5.923 U2.27
  Top Layer w0.5: v1(-7.6,10) R42.1 ; DN16.1 R42.2 R46.2
  Bottom Layer w0.5: v1(-7.6,10) C16.2 R50.2
IO28: C21.2 DN20.1 R54.1 R54.2 R58.2 R62.2 U2.28 | length 26.6
  Top Layer w0.15: R54.1 R54.2
  Top Layer w0.2: v1(-10.6,10) -6.945,6.345 ccw(c-5.976,7.315) -5.976,5.944 1.256,5.944 cw(c1.256,4.572) 2.226,5.542 U2.28
  Top Layer w0.5: v1(-10.6,10) R54.1 ; DN20.1 R58.2
  Bottom Layer w0.5: v1(-10.6,10) C21.2 R62.2
NetC17_2: C17.2 D1.2 D2.2 U1.2 U1.3 | length 41.2
  Top Layer w0.5: U1.2 U1.3 -6.256,-1.47 cw(c-6.056,-1.47) C17.2
  Top Layer w0.8: D1.2 cw(c-14.545,-6.682) -14.545,-6.477 -6.121,-6.477 ccw(c-6.121,-4.978) -4.623,-4.978 v1(-4.623,-1.905) ccw(c-5.258,-1.905) -5.258,-1.27 C17.2 ; v1(12.878,0.92) D2.2
  Bottom Layer w0.8: v1(-4.623,-1.905) -4.623,-2.769 ccw(c-3.251,-2.769) -3.251,-4.14 6.416,-4.14 ccw(c6.416,-0.757) 8.809,-3.149 v1(12.878,0.92)
NetC25_1: C25.1 L1.1 U1.5 | length 4.3
  Top Layer w0.4: L1.1 ccw(c-12.01,-3.27) -12.01,-4 C25.1 U1.5
NetC25_2: C25.2 U1.6 | length 1.1
  Top Layer w0.4: C25.2 cw(c-9.896,-5) -9.896,-4.95 U1.6
NetC34_2: C34.2 U2.46 | length 2.8
  Top Layer w0.18: C34.2 cw(c3.587,-6.418) 2.786,-5.617 U2.46@4.143,-4.26
NetC36_2: C36.2 U2.22 | length 2.8
  Top Layer w0.18: U2.22@7.857,4.26 9.214,5.617 ccw(c8.413,6.418) C36.2
NetC38_2: C38.2 U2.7 | length 3.5
  Top Layer w0.18: U2.7 9.69,-3.336 cw(c8.993,-4.033) 9.978,-4.033 9.978,-4.591 ccw(c11.35,-4.591) 10.38,-5.561 C38.2
NetC41_2: C41.2 U2.5 X1.3 | length 14.1
  Top Layer w0.18: U2.5 8.92,-3.981 cw(c7.95,-4.951) 9.322,-4.951 9.322,-5.525 ccw(c10.693,-5.525) 10.693,-6.897 16.786,-6.897 ccw(c16.786,-6.516) 17.167,-6.516 17.167,-5.433 ccw(c16.901,-5.433) 16.901,-5.166 C41.2 16.568,-5.101 15.811,-5.101 X1.3
NetC42_2: C42.2 U2.6 X1.1 | length 7.1
  Top Layer w0.18: U2.6 U2.6@9.252,-3.605 ; U2.6@9.253,-3.606 cw(c8.282,-4.575) 9.653,-4.575 9.653,-5.367 ccw(c10.738,-5.367) 10.738,-6.452 11.507,-6.452 ccw(c11.507,-5.477) C42.2 X1.1
NetD2_1: D2.1 J1.1 | length 3.8
  Top Layer w1.5: D2.1 J1.1
NetJ2_2: J2.2 R21.1 USB1.2 | length 8.2
  Top Layer w0.2: J2.2 -16.441,-0.711 ccw(c-18.808,1.656) -15.461,1.656 -15.461,2.337 cw(c-15.02,2.337) -15.02,2.778 R21.1
  Top Layer w0.8: USB1.2 -17.27,-1 cw(c-17.27,-1.27) J2.2
NetJ2_3: J2.3 R22.1 USB1.3 | length 7.2
  Top Layer w0.2: J2.3 -16.619,1.651 ccw(c-18.415,3.447) -15.875,3.447 cw(c-15.258,3.447) -15.258,4.064 R22.1
  Top Layer w0.8: USB1.3 -17.27,1 ccw(c-17.27,1.27) J2.3
SWCLK: J3.1 U2.37 | length 4.5
  Top Layer w0.18: J3.1 -0.997,-2.54 ccw(c-0.997,-1.168) -0.028,-2.138 U2.37
SWDIO: J3.2 U2.34 | length 6.7
  Top Layer w0.18: J3.2 0.905,0 ccw(c0.905,1.357) 1.865,0.397 2.216,0.749 ccw(c1.933,1.031) U2.34@2.216,1.314 ; U2.34 U2.34@2.118,1.407
pads on no net: USB1.

## Polygon pours and split planes (outlines as drawn)
GND on Bottom Layer "NONET_L02_P-001" (solid, remove dead copper, pour order 0): -25,15 -25,-15 25,-15 25,15
GND on Top Layer "NONET_L02_P-001" (solid, remove dead copper, pour order 1): -25,15 -25,-15 25,-15 25,15

## Keep-outs
Keep-Out Layer:
  the board outline again, w0

## Other copper
Top Layer:
  pour cut-out: -20.1,10.852 23.335,10.852 23.335,11.95 -20.1,11.95
  pour cut-out: -17.5,-11.948 24.123,-11.948 24.123,-10.85 -17.5,-10.85
  pour cut-out: -15.266,1.256 -15.266,-3.796 -10.214,-3.796 -10.214,1.256

## Silkscreen, mask and mechanical layers (free items; w line width, h text height)
Top Overlay:
  text "STM32H503CBT6 Board / 2k23 v1.0.0" at -5.265,5.25 h0.8
Top Solder:
  rectangle: -19.6,11.199 -17.942,11.601
  rectangle: -16.6,11.199 -14.942,11.601
  rectangle: -13.6,11.199 -11.942,11.601
  rectangle: -10.6,11.199 -8.942,11.601
  rectangle: -7.6,11.199 -5.942,11.601
  rectangle: -4.6,11.199 -2.942,11.601
  rectangle: -1.6,11.199 0.058,11.601
  rectangle: 1.4,11.199 3.058,11.601
  rectangle: 4.4,11.199 6.058,11.601
  rectangle: 7.4,11.199 9.058,11.601
  rectangle: 10.4,11.199 12.058,11.601
  rectangle: 13.4,11.199 15.058,11.601
  rectangle: 16.4,11.199 18.058,11.601
  rectangle: 19.4,11.199 21.058,11.601
  region: 22.931,11.4 22.931,13.058 22.529,13.058 22.529,11.4
  rectangle: 22,-11.601 23.658,-11.199
  rectangle: 19,-11.601 20.658,-11.199
  rectangle: 16,-11.601 17.658,-11.199
  rectangle: 13,-11.601 14.658,-11.199
  rectangle: 10,-11.601 11.658,-11.199
  rectangle: 7,-11.601 8.658,-11.199
  rectangle: 4,-11.601 5.658,-11.199
  rectangle: 1,-11.601 2.658,-11.199
  rectangle: -2,-11.601 -0.342,-11.199
  rectangle: -5,-11.601 -3.342,-11.199
  rectangle: -8,-11.601 -6.342,-11.199
  rectangle: -11,-11.601 -9.342,-11.199
  rectangle: -14,-11.601 -12.342,-11.199
  rectangle: -17,-11.601 -15.342,-11.199